# Allegro board LEXICON_GLOVE_4.brd
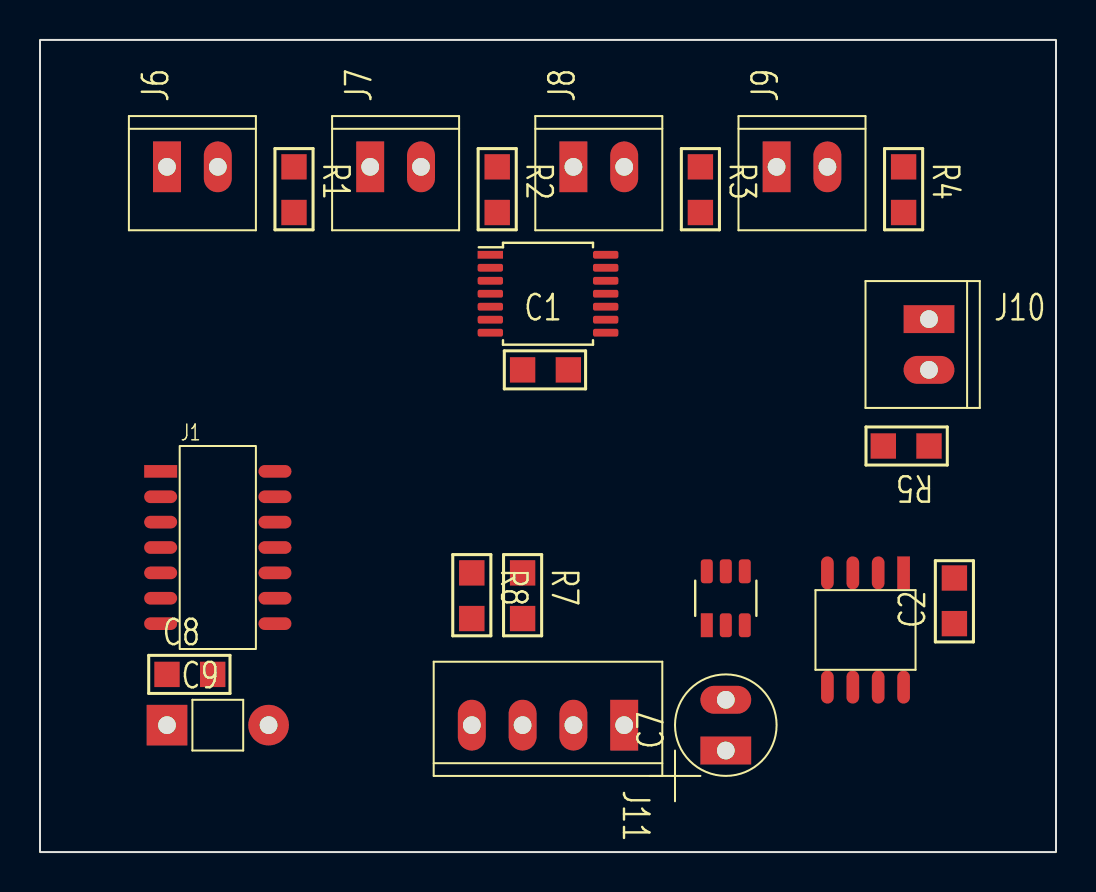
[diagram p0: board, top side]
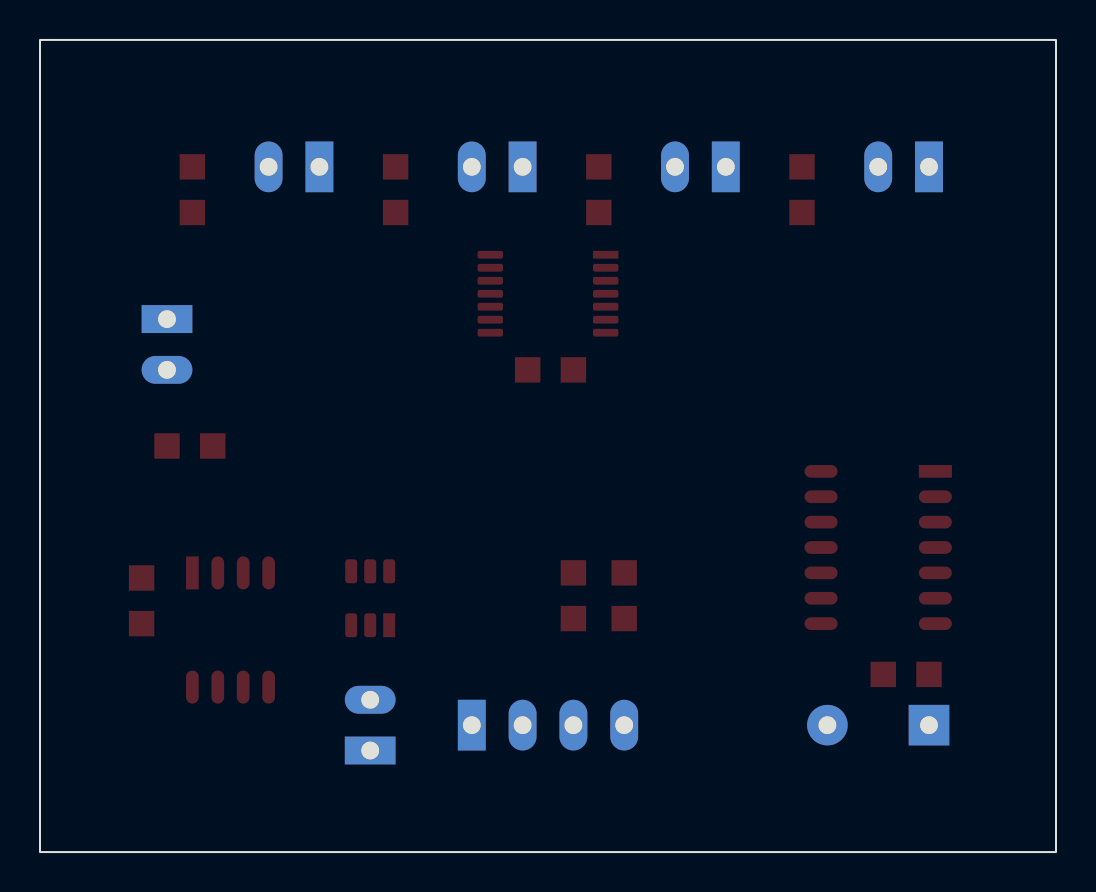
[diagram p1: board, bottom side, seen from below]

Outline 50.8 x 40.64 mm; copper layers: TOP, BOTTOM. Coordinates in mm from the lower left corner of the outline.
Outline path: rectangle 0,0 50.8,40.64

## Design rules (mm)
constraint set DEFAULT: min track width 0.254

## Placement (name value [footprint] x y rotation side)
C1  100n  [GU-R0805]  24.13 24.13 0 top
C2  100n  [GU-R0805]  45.72 11.43 90 top
C7  10u  [GU-CAPCYL100]  34.29 5.08 90 top
C8  100n  [GU-R0805]  6.35 8.89 0 top
C9  10u  [GU-RC200]  6.35 6.35 0 top
J1  MCP3428  [GU-SOIC14]  8.89 15.24 0 top
J3  MCP3421  [SOT23-6P95_280X145L45X37]  34.29 12.7 0 top
J6  F1  [GU-MOLEX2]  6.35 34.29 90 top
J7  F2  [GU-MOLEX2]  16.51 34.29 90 top
J8  F3  [GU-MOLEX2]  26.67 34.29 90 top
J9  F4  [GU-MOLEX2]  36.83 34.29 90 top
J10  F5  [GU-MOLEX2]  44.45 26.67 0 top
J11  PI  [GU-MOLEX4]  29.21 6.35 270 top
R1  33k  [GU-R0805]  12.7 34.29 270 top
R2  33k  [GU-R0805]  22.86 34.29 270 top
R3  33k  [GU-R0805]  33.02 34.29 270 top
R4  33k  [GU-R0805]  43.18 34.29 270 top
R5  33k  [GU-R0805]  44.45 20.32 180 top
R7  10k  [GU-R0805]  24.13 13.97 270 top
R8  10k  [GU-R0805]  21.59 13.97 270 top
U1  TL074  [SOP14P65_500X640X120L60X24]  25.4 27.94 270 top
U2  TL071  [GU-SOIC8]  43.18 13.97 270 top

## Library data of the parts
C1 C2 C8 C9 = CAP NP
C7 = C
J1 = CON14C
J3 = CON6AP_0
J6-J10 = CON2
J11 = CON4
R1-R5 R7 R8 = RESISTOR
U1 = TL074
U2 = TL071_1

## Footprints (pads in the part's own frame, mm; a bottom-side part is the same pattern mirrored in y, then rotated)
GU-CAPCYL100
  rect 1.397x2.54 hole 0.889: 1(0,0)
  oval 1.397x2.54 hole 0.889: 2(2.54,0)
GU-MOLEX2
  rect 2.54x1.397 hole 0.889: 1(0,0)
  oval 2.54x1.397 hole 0.889: 2(0,-2.54)
GU-MOLEX4
  rect 2.54x1.397 hole 0.889: 1(0,0)
  oval 2.54x1.397 hole 0.889: 2(0,-2.54) 3(0,-5.08) 4(0,-7.62)
GU-R0805
  rect 1.27x1.27 smd: 1(0,0) 2(2.286,0)
GU-RC200
  rect 2.032x2.032 hole 0.889: 1(0,0)
  round 2.032 hole 0.889: 2(5.08,0)
GU-SOIC8
  rect 1.651x0.635 smd: 1(0,0)
  oval 1.651x0.635 smd: 2(0,-1.27) 3(0,-2.54) 4(0,-3.81) 5(5.715,-3.81) 6(5.715,-2.54) 7(5.715,-1.27) 8(5.715,0)
GU-SOIC14
  rect 1.651x0.635 smd: 1(-2.857,3.81)
  oval 1.651x0.635 smd: 2(-2.857,2.54) 3(-2.857,1.27) 4(-2.857,0) 5(-2.857,-1.27) 6(-2.857,-2.54) 7(-2.857,-3.81) 8(2.857,-3.81) 9(2.857,-2.54) 10(2.857,-1.27) 11(2.857,0) 12(2.857,1.27) 13(2.857,2.54) 14(2.857,3.81)
SOP14P65_500X640X120L60X24
  rect 0.39x1.27 smd: 1(-1.95,-2.885)
  rrect 0.39x1.27 smd: 2(-1.3,-2.885) 3(-0.65,-2.885) 4(0,-2.885) 5(0.65,-2.885) 6(1.3,-2.885) 7(1.95,-2.885) 8(1.95,2.885) 9(1.3,2.885) 10(0.65,2.885) 11(0,2.885) 12(-0.65,2.885) 13(-1.3,2.885) 14(-1.95,2.885)
SOT23-6P95_280X145L45X37
  rect 0.6x1.2 smd: 1(-0.95,-1.35)
  rrect 0.6x1.2 smd: 2(0,-1.35) 3(0.95,-1.35) 4(0.95,1.35) 5(0,1.35) 6(-0.95,1.35)

## Nets
3V3: C1.2 C2.2 C7.1 C8.2 C9.2 J1.6 J1.9 J1.10 J3.5 J6.1 J7.1 J8.1 J9.1 J10.1 J11.1 R7.1 R8.1 U1.4 U2.7
GND: C1.1 C2.1 C7.2 C8.1 C9.1 J1.2 J1.4 J1.5 J1.12 J1.14 J3.2 J3.6 J11.2 R1.2 R2.2 R3.2 R4.2 R5.2 U1.11 U2.4(V-)
FING1: J1.1 U1.1 U1.2
FING2: J1.3 U1.6 U1.7
FING3: J1.11 U1.8 U1.9
FING4: J1.13 U1.13 U1.14(OUT)
FING5: J3.1 U2.2 U2.6
SCL: J1.8 J3.3 J11.4 R8.2
SDA: J1.7 J3.4 J11.3 R7.2
N00544: J6.2 R1.1 U1.3
N00572: J7.2 R2.1 U1.5
N00597: J8.2 R3.1 U1.10
N00622: J9.2 R4.1 U1.12
N00734: J10.2 R5.1 U2.3

Pads without a net: U2 1 5 8
